# EAGLE board 5V AC-DC (EAGLE 9.6.2)
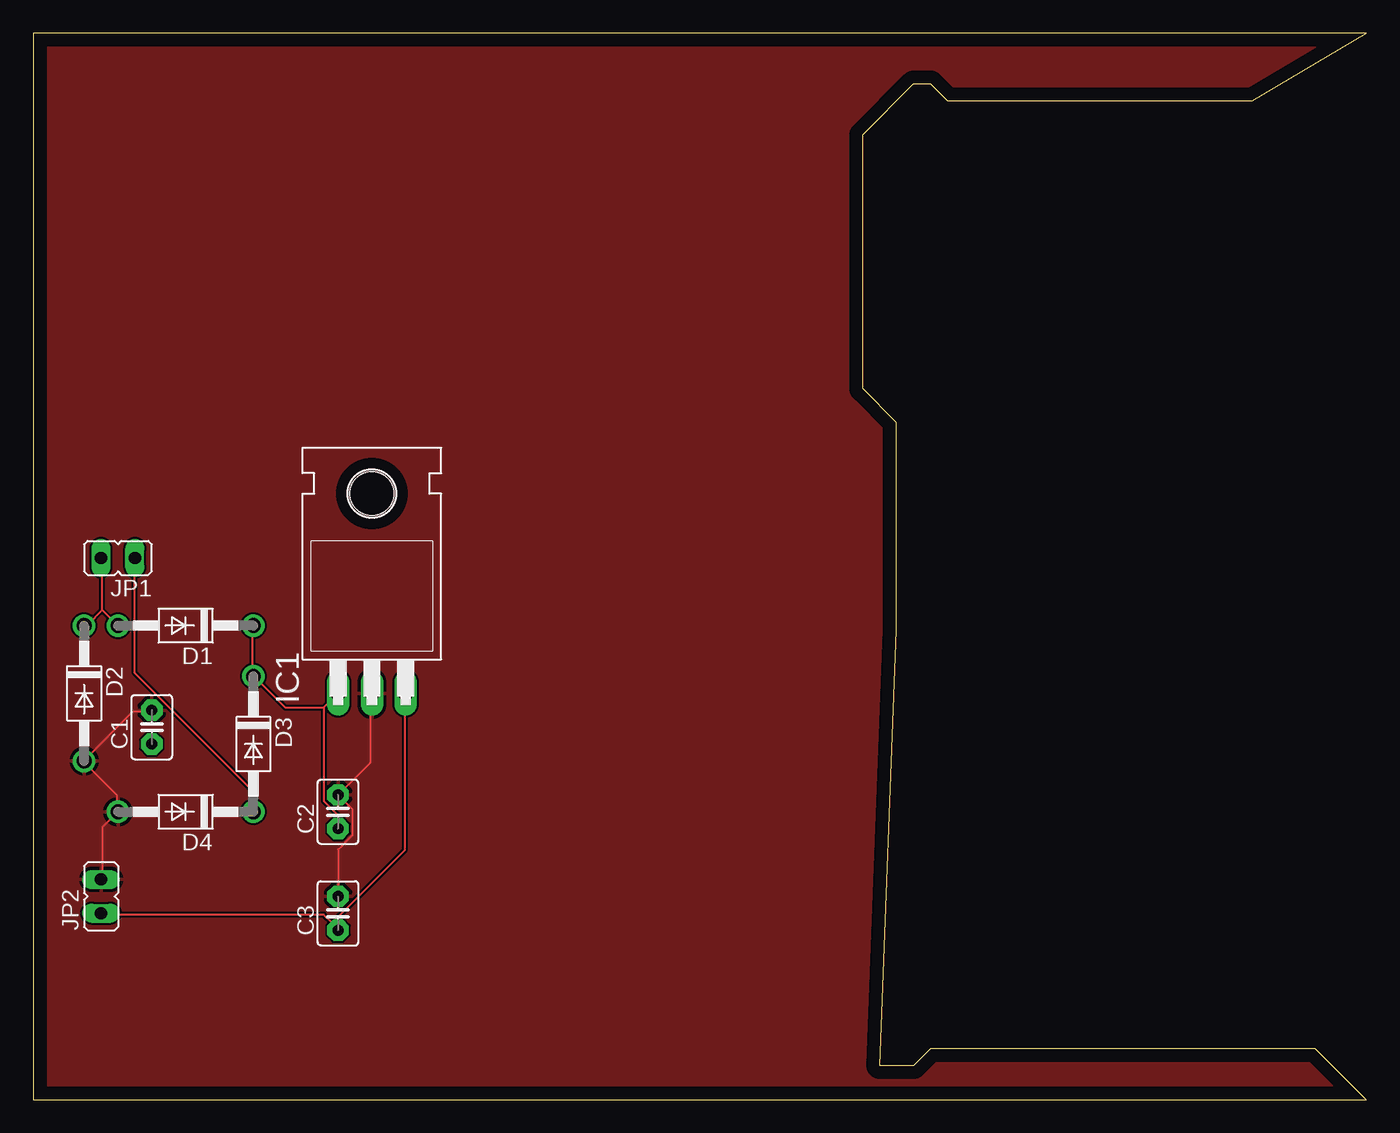
[diagram p0: board, top side]
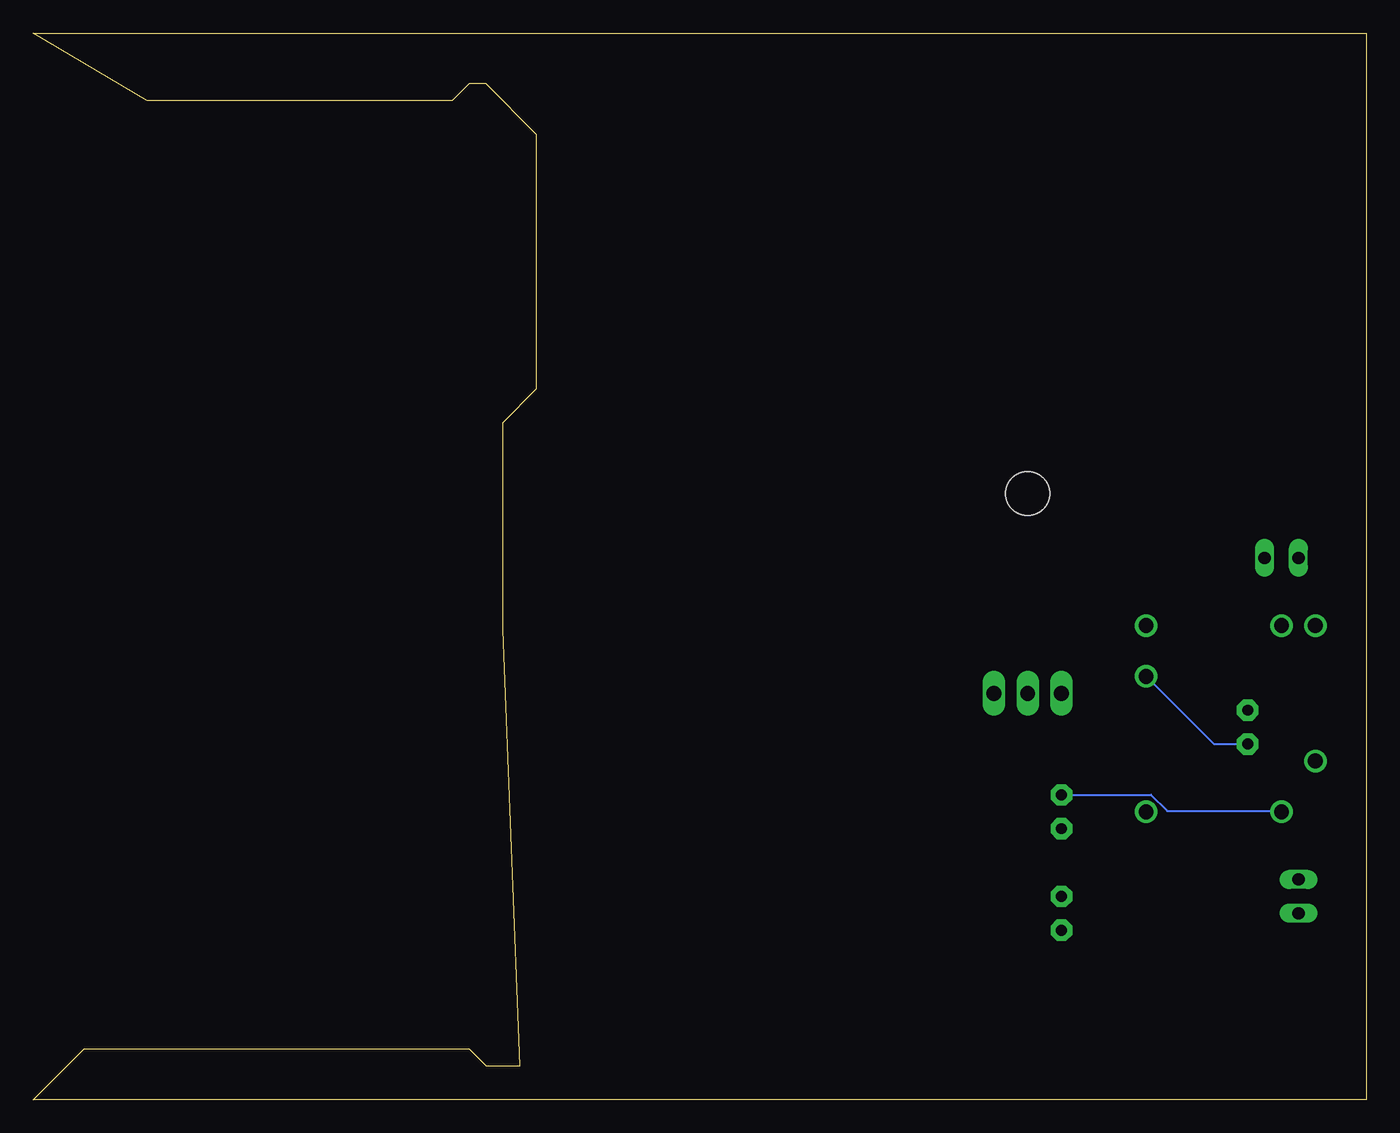
[diagram p1: board, bottom side, seen from below]

Size 100 x 80 mm. Coordinates in mm from the lower left corner, seen from the top.
Outline: 0,0 100,0 96.19,3.81 67.31,3.81 66.04,2.54 63.5,2.54 64.77,35.23 64.77,50.8 62.23,53.34 62.23,72.39 66.04,76.2 67.31,76.2 68.58,74.93 91.44,74.93 100,80 0,80 0,0
Copper layers (1*16): Top 0.035mm / dielectric 1.5mm / Bottom 0.035mm
Design rules "default": minimum track width 6mil, minimum drill 0.35mm, track to track 6mil, track to pad 6mil, pad to pad 6mil, via to via 6mil, smd to smd 6mil, copper to edge 40mil, drill to drill 6mil, minimum pad ring 10mil, minimum via ring 8mil, stop-mask expansion 4mil, vias tented up to drill 0mil, thermal gap 10mil

## Footprints (pad centres in the part's own frame; a part is rotated, then mirrored left to right if it is on the bottom)
C2.5-3 = drill 0.813 pad 1.6 octagon: 1 -1.27,0; 2 1.27,0
DO41-10 = drill 1.118: A 5.08,0; C -5.08,0
TO220H = drill 1.118 long: 1 -2.54,-10.16; 2 0,-10.16; 3 2.54,-10.16 | hole 3.302: 0,4.826
JP1 = drill 0.914 long: 1 0,-1.27; 2 0,1.27
TQFP-MEGA8L = smd 1 x 0.4: P$1 -0.5,6.3; P$2 -0.5,5.5; P$3 -0.5,4.7; P$4 -0.5,3.9; P$5 -0.5,3.1; P$6 -0.5,2.3; P$7 -0.5,1.5; P$8 -0.5,0.7; P$17 7.5,0.7; P$18 7.5,1.5; P$19 7.5,2.3; P$20 7.5,3.1; P$21 7.5,3.9; P$22 7.5,4.7; P$23 7.5,5.5; P$24 7.5,6.3 | smd 0.4 x 1: P$9 0.7,-0.5; P$10 1.5,-0.5; P$11 2.3,-0.5; P$12 3.1,-0.5; P$13 3.9,-0.5; P$14 4.7,-0.5; P$15 5.5,-0.5; P$16 6.3,-0.5; P$25 6.3,7.5; P$26 5.5,7.5; P$27 4.7,7.5; P$28 3.9,7.5; P$29 3.1,7.5; P$30 2.3,7.5; P$31 1.5,7.5; P$32 0.7,7.5

## Placement (x,y rotation side)
C1  100uF  [C2.5-3]  8.89,27.94 90 top
C2  0.33uF  [C2.5-3]  22.86,21.59 90 top
C3  0.1uF  [C2.5-3]  22.86,13.97 90 top
D1  1N4004  [DO41-10]  11.43,35.56 180 top
D2  1N4004  [DO41-10]  3.81,30.48 270 top
D3  1N4004  [DO41-10]  16.51,26.67 270 top
D4  1N4004  [DO41-10]  11.43,21.59 180 top
IC1  7805T  [TO220H]  25.4,40.64 0 top
JP1  12v AC  [JP1]  6.35,40.64 90 top
JP2  5V DC  [JP1]  5.08,15.24 0 top
U$1  MEGA8L-DEV  [TQFP-MEGA8L]  -15.24,-7.62 0 top  (outside the outline)
U$2  MEGA8L-DEV  [TQFP-MEGA8L]  -26.67,-7.62 0 top  (outside the outline)

## Library data of the parts
C1-C3 = capacitor-wima
D1-D4 = diode
IC1 = linear
JP1 JP2 = jumper
U$1 U$2 = MEGA8L

## Nets
GND: C1.2 C2.2 C3.2 D2.A D4.A IC1.2 JP2.2
N$1: D1.A D2.C JP1.2
N$2: C1.1 C2.1 D1.C D3.C IC1.1
N$3: U$1.P$1 U$2.P$1
N$4: D3.A D4.C JP1.1
N$5: U$1.P$2 U$2.P$2
N$6: C3.1 IC1.3 JP2.1
N$7: U$1.P$3 U$2.P$3
N$8: U$1.P$4 U$2.P$4
N$9: U$1.P$5 U$2.P$5
N$10: U$1.P$6 U$2.P$6
N$11: U$1.P$7 U$2.P$7
N$12: U$1.P$8 U$2.P$8
N$13: U$1.P$9 U$2.P$9
N$14: U$1.P$10 U$2.P$10
N$15: U$1.P$11 U$2.P$11
N$16: U$1.P$12 U$2.P$12
N$17: U$1.P$13 U$2.P$13
N$18: U$1.P$14 U$2.P$14
N$19: U$1.P$15 U$2.P$15
N$20: U$1.P$16 U$2.P$16
N$21: U$1.P$17 U$2.P$17
N$22: U$1.P$18 U$2.P$18
N$23: U$1.P$19 U$2.P$19
N$24: U$1.P$20 U$2.P$20
N$25: U$1.P$21 U$2.P$21
N$26: U$1.P$22 U$2.P$22
N$27: U$1.P$23 U$2.P$23
N$28: U$1.P$24 U$2.P$24
N$29: U$1.P$25 U$2.P$25
N$30: U$1.P$26 U$2.P$26
N$31: U$1.P$27 U$2.P$27
N$32: U$1.P$28 U$2.P$28
N$33: U$1.P$29 U$2.P$29
N$34: U$1.P$30 U$2.P$30
N$35: U$1.P$31 U$2.P$31
N$36: U$1.P$32 U$2.P$32

## Tracks (layer width: path | path; a pad name or v marks a point on that pad's centre or on a via)
GND
  Top 0.152: JP2.2 5.18,16.61 5.18,20.42 D4.A 6.25,21.64 6.25,22.86 3.81,25.3 D2.A 3.81,25.45 7.47,29.11 8.84,29.11 C1.2 | C3.2 22.86,18.75 23.93,19.81 23.93,21.79 C2.2 25.3,25.3 25.3,30.48 IC1.2
  Bottom 0.152: C2.2 16.15,22.86 14.94,21.64 6.4,21.64 D4.A
  pour Top: -3.81,91.44 107.95,91.44 109.22,90.17 109.22,-5.08 102.87,-11.43 -5.08,-11.43 -5.08,91.44 -3.81,92.71
N$1
  Top 0.152: 5.18,36.73 5.18,40.54 JP1.2 | D1.A 5.18,36.73 | 5.18,36.73 4.12,35.66 3.81,35.66 D2.C
N$2
  Top 0.152: C2.1 22.86,21.34 21.79,22.4 21.79,29.41 | IC1.1 21.79,29.41 | D1.C 16.46,35.51 16.46,31.85 D3.C 16.61,31.7 18.9,29.41 21.79,29.41
  Bottom 0.152: C1.1 11.43,26.67 D3.C
N$3  (1 unrouted)
N$4
  Top 0.152: JP1.1 7.62,32 16.46,23.16 16.46,21.64 D3.A
N$5  (1 unrouted)
N$6
  Top 0.152: 22.4,13.26 22.86,12.8 C3.1 22.4,13.26 | 22.4,13.26 21.79,13.87 5.18,13.87 JP2.1 | 22.4,13.26 27.89,18.75 27.89,30.48 IC1.3
N$7  (1 unrouted)
N$8  (1 unrouted)
N$9  (1 unrouted)
N$10  (1 unrouted)
N$11  (1 unrouted)
N$12  (1 unrouted)
N$13  (1 unrouted)
N$14  (1 unrouted)
N$15  (1 unrouted)
N$16  (1 unrouted)
N$17  (1 unrouted)
N$18  (1 unrouted)
N$19  (1 unrouted)
N$20  (1 unrouted)
N$21  (1 unrouted)
N$22  (1 unrouted)
N$23  (1 unrouted)
N$24  (1 unrouted)
N$25  (1 unrouted)
N$26  (1 unrouted)
N$27  (1 unrouted)
N$28  (1 unrouted)
N$29  (1 unrouted)
N$30  (1 unrouted)
N$31  (1 unrouted)
N$32  (1 unrouted)
N$33  (1 unrouted)
N$34  (1 unrouted)
N$35  (1 unrouted)
N$36  (1 unrouted)